# EAGLE board drivercontrols_adafruit_M0 (EAGLE 9.5.1)
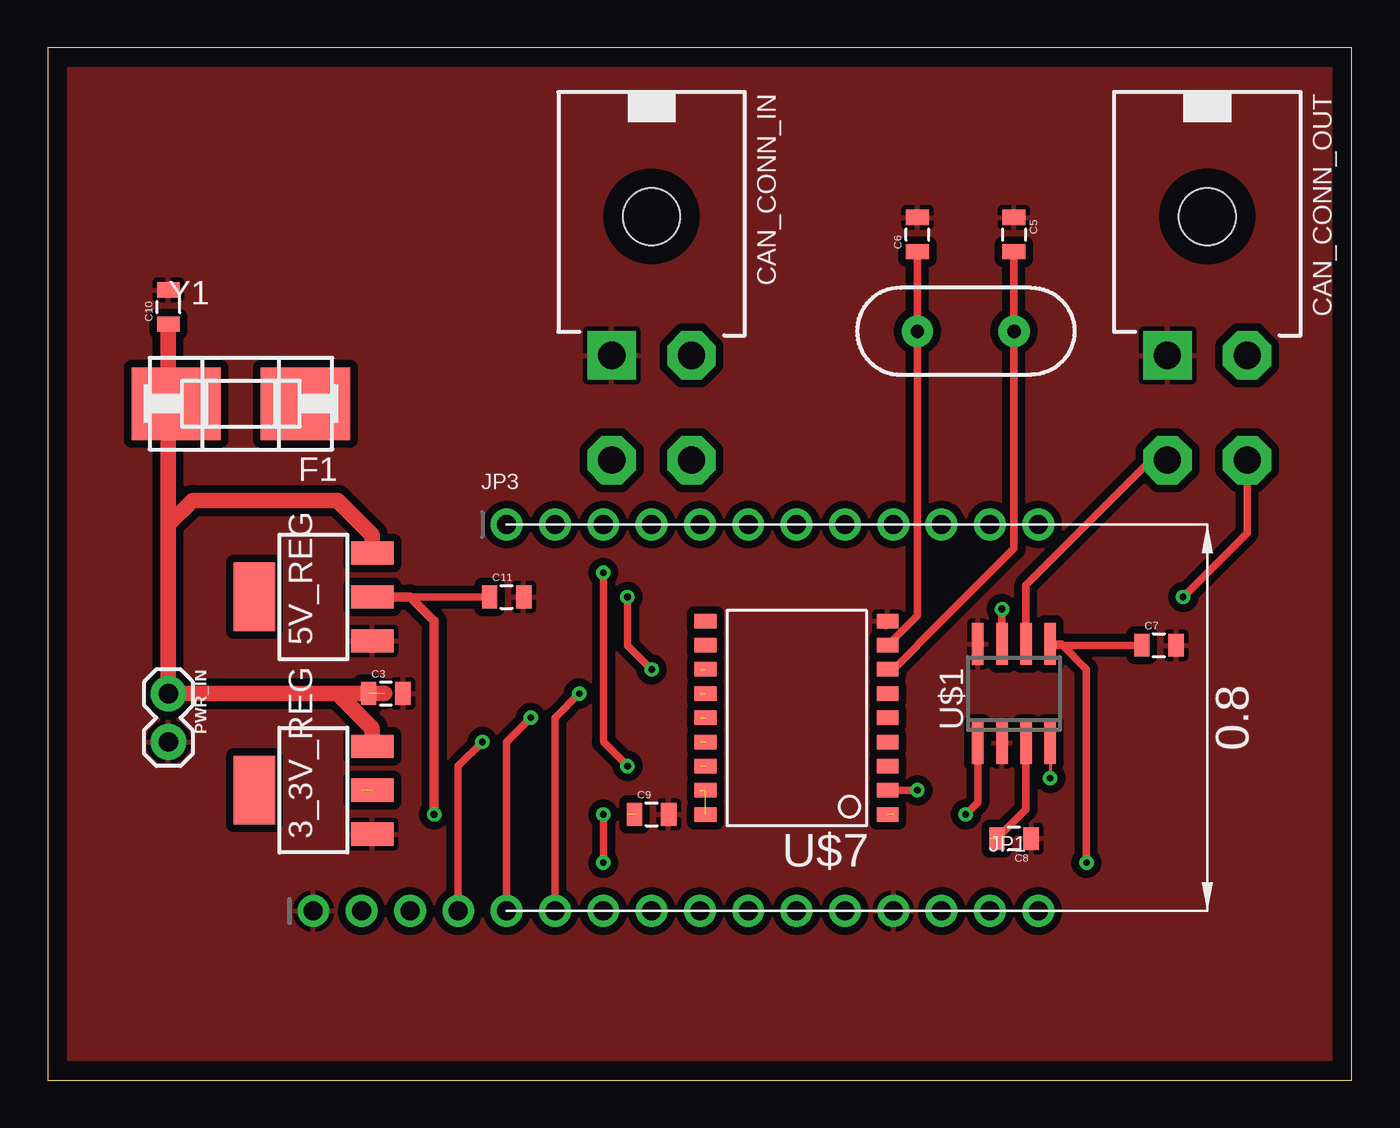
[diagram p0: board, top side]
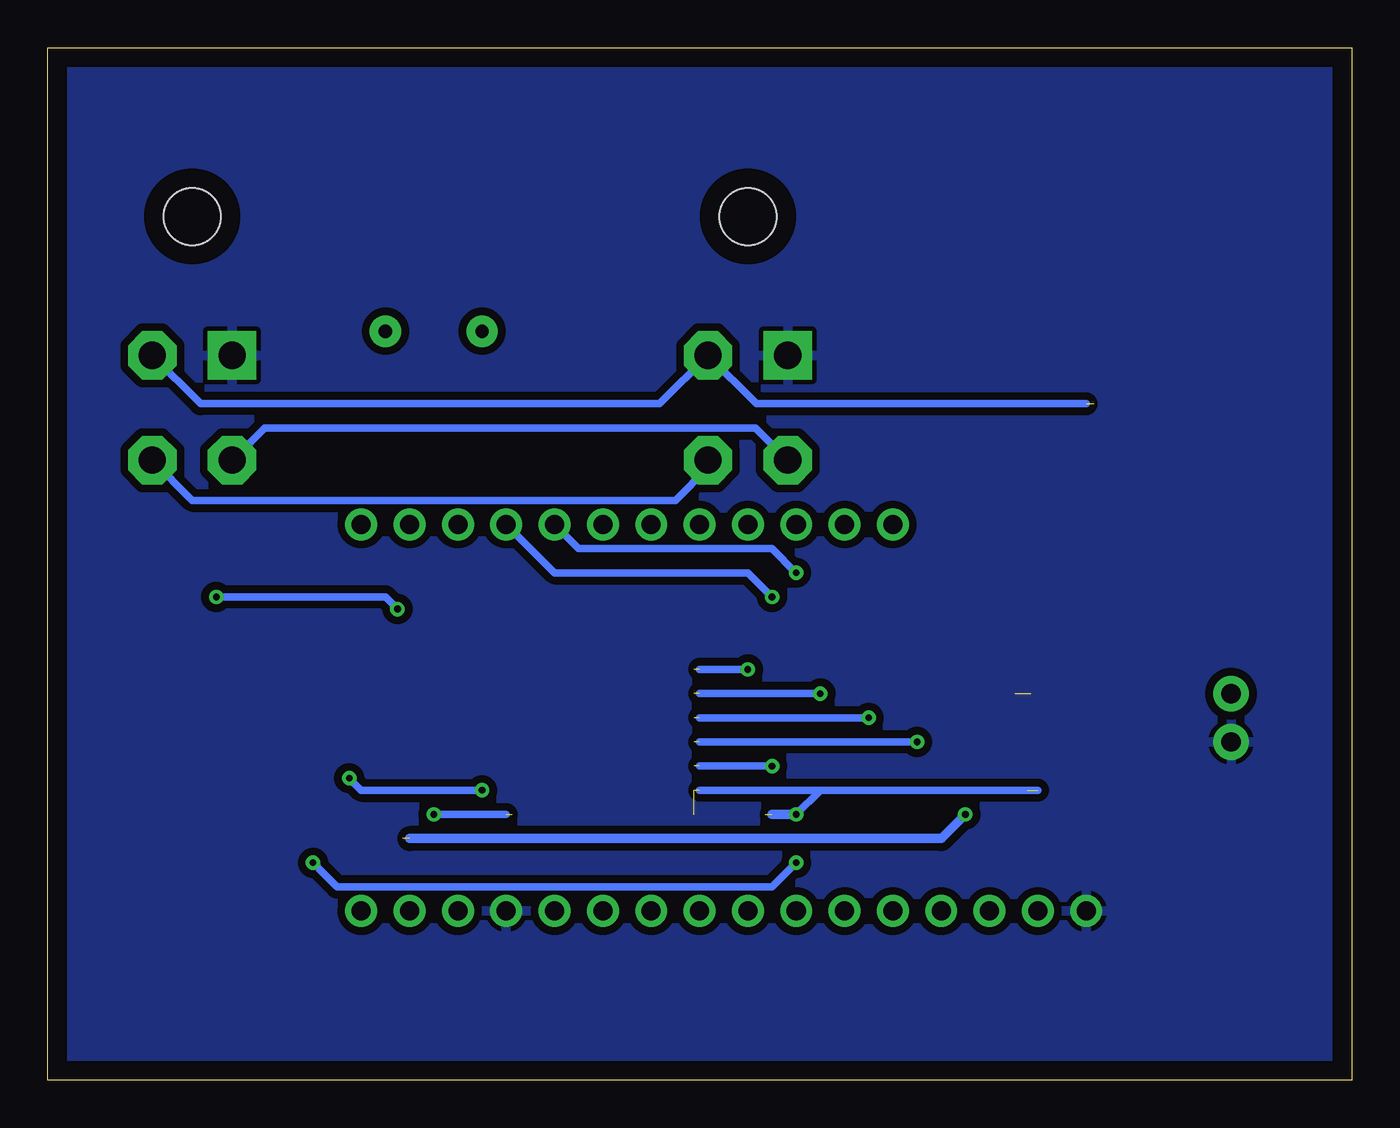
[diagram p1: board, bottom side, seen from below]

Size 68.56 x 54.28 mm. Coordinates in mm from the lower left corner, seen from the top.
Outline: 0,0 68.56,0 68.56,54.28 0,54.28 0,0
Copper layers (1*16): Top 0.035mm / dielectric 1.5mm / Bottom 0.035mm
Design rules "default": minimum track width 6mil, minimum drill 0.35mm, track to track 6mil, track to pad 6mil, pad to pad 6mil, via to via 6mil, smd to smd 6mil, copper to edge 40mil, drill to drill 6mil, minimum pad ring 10mil, minimum via ring 8mil, stop-mask expansion 4mil, vias tented up to drill 0mil, thermal gap 10mil

## Footprints (pad centres in the part's own frame; a part is rotated, then mirrored left to right if it is on the bottom)
SOT223 = smd 1.219 x 2.235: 1 -2.311,-3.099; 2 0,-3.099; 3 2.311,-3.099 | smd 3.6 x 2.2: 4 0,3.099
0805 = smd 0.8 x 1.2: 1 -0.9,0; 2 0.9,0
39-30-?04? = drill 1.422 pad 2.54 square: 1 2.095,0 | drill 1.422 pad 2.54 octagon: 2 -2.095,0; 3 2.095,5.512; 4 -2.095,5.512 | hole 3: 0,-7.3
OMNIBLOK = smd 4.7 x 3.8: P$1 -3.4,0; P$2 3.4,0
1X16_ROUND = drill 1 pad 1.676: 1 -19.05,0; 2 -16.51,0; 3 -13.97,0; 4 -11.43,0; 5 -8.89,0; 6 -6.35,0; 7 -3.81,0; 8 -1.27,0; 9 1.27,0; 10 3.81,0; 11 6.35,0; 12 8.89,0; 13 11.43,0; 14 13.97,0; 15 16.51,0; 16 19.05,0
1X12_ROUND = drill 1 pad 1.676: 1 -13.97,0; 2 -11.43,0; 3 -8.89,0; 4 -6.35,0; 5 -3.81,0; 6 -1.27,0; 7 1.27,0; 8 3.81,0; 9 6.35,0; 10 8.89,0; 11 11.43,0; 12 13.97,0
1X02 = drill 1.016 pad 1.88: 1 0,0; 2 2.54,0
SOIC8 = smd 0.6 x 2.2: 1 -1.905,-2.6; 2 -0.635,-2.6; 3 0.635,-2.6; 4 1.905,-2.6; 5 1.905,2.6; 6 0.635,2.6; 7 -0.635,2.6; 8 -1.905,2.6
SO-18W = smd 0.762 x 1.143: 1 -5.08,-4.788; 2 -3.81,-4.788; 3 -2.54,-4.788; 4 -1.27,-4.788; 5 0,-4.788; 6 1.27,-4.788; 7 2.54,-4.788; 8 3.81,-4.788; 9 5.08,-4.788; 10 5.08,4.788; 11 3.81,4.788; 12 2.54,4.788; 13 1.27,4.788; 14 0,4.788; 15 -1.27,4.788; 16 -2.54,4.788; 17 -3.81,4.788; 18 -5.08,4.788
HC49US = drill 0.7 pad 1.651: 1 -2.54,0; 2 2.54,0

## Placement (x,y rotation side)
3_3V_REG  NCP1117ST33T3G  [SOT223]  13.97,15.24 90 top
5V_REG  NCP1117ST50T3G  [SOT223]  13.97,25.4 90 top
C3  10µF  [0805]  17.78,20.32 0 top
C5  [0805]  50.8,44.45 270 top
C6  [0805]  45.72,44.45 90 top
C7  .1µF  [0805]  58.42,22.86 0 top
C8  .1µF  [0805]  50.8,12.7 180 top
C9  10µF  [0805]  31.75,13.97 0 top
C10  10µF  [0805]  6.35,40.64 90 top
C11  10µF  [0805]  24.13,25.4 0 top
CAN_CONN_IN  39-30-04?  [39-30-?04?]  31.75,38.1 180 top
CAN_CONN_OUT  39-30-04?  [39-30-?04?]  60.96,38.1 180 top
F1  SMD-MICRO-FUSE-BLOCK  [OMNIBLOK]  10.16,35.56 180 top
JP1  [1X16_ROUND]  33.02,8.89 0 top
JP3  [1X12_ROUND]  38.1,29.21 0 top
PWR_IN  [1X02]  6.35,20.32 270 top
U$1  MCP2562  [SOIC8]  50.8,20.32 0 top
U$7  MCP2515  [SO-18W]  39.37,19.05 90 top
Y1  [HC49US]  48.26,39.37 0 top

## Library data of the parts
3_3V_REG 5V_REG U$1 U$7 = NUSOLAR_Custom
C3 C5-C11 = SparkFun-Capacitors
CAN_CONN_IN CAN_CONN_OUT = con-molex-mini-fit
F1 = f-lf-omniblok-s
JP1 JP3 = microbuilder
PWR_IN = SparkFun-Connectors
Y1 = SparkFun-FreqCtrl

## Nets
3.3V: 3_3V_REG.2 C7.1 C9.1 U$1.5 U$7.17 U$7.18
5V: 5V_REG.2 C8.2 C11.1 U$1.3
!RESET: JP1.16
+3V3: JP1.15
A0: JP1.12
A1: JP1.11
A2: JP1.10
A3: JP1.9
A4: JP1.8
A5: JP1.7
AREF: JP1.14
CAN+: CAN_CONN_IN.2 CAN_CONN_OUT.2 F1.P$1
CAN_CS: JP3.8 U$7.16
CAN_H: CAN_CONN_IN.4 CAN_CONN_OUT.4 U$1.7
CAN_INT: JP3.9 U$7.12
CAN_L: CAN_CONN_IN.3 CAN_CONN_OUT.3 U$1.6
CAN_RX: U$1.4 U$7.2
CAN_TX: U$1.1 U$7.1
D0: JP1.2
D1: JP1.3
D10: JP3.7
D11: JP3.6
D12: JP3.5
D13: JP3.4
EN: JP3.2
GND: 3_3V_REG.1 5V_REG.1 C3.2 C5.1 C6.2 C7.2 C8.1 C9.2 C10.2 C11.2 CAN_CONN_IN.1 CAN_CONN_OUT.1 JP1.1 JP1.13 PWR_IN.2 U$1.2 U$1.8 U$7.9
MISO: JP1.4 U$7.15
MOSI: JP1.5 U$7.14
N$1: C5.2 U$7.7 Y1.2
N$2: 3_3V_REG.3 5V_REG.3 C3.1 C10.1 F1.P$2 PWR_IN.1
N$11: C6.1 U$7.8 Y1.1
SCK: JP1.6 U$7.13
SCL: JP3.11
SDA: JP3.12
STROBE: JP3.10
VBAT: JP3.1
VBUS: JP3.3

## Tracks (layer width: path | path; a pad name or v marks a point on that pad's centre or on a via)
3.3V  (via drill 0.35)  (4 unrouted)
  Top 0.152: U$1.5 52.77,22.86
  Top 0.406: C7.1 52.77,22.86 | v29.21,13.97 v29.21,11.43 | U$1.5 53.28,22.92 54.61,21.59 v54.61,11.43
  Bottom 0.406: 16.51,15.24 27.94,15.24 | 27.94,15.24 34.29,15.24 | 27.94,15.24 v29.21,13.97 | v29.21,11.43 30.48,10.16 53.34,10.16 v54.61,11.43
  Bottom 0.508: 30.48,13.97 v29.21,13.97
5V  (via drill 0.35)  (1 unrouted)
  Top 0.406: U$1.3 51.44,14.23 C8.2 | 19.05,25.4 C11.1
  Top 0.508: v20.32,13.97 20.32,24.13 19.05,25.4 5V_REG.2
  Bottom 0.508: v20.32,13.97 21.59,12.7 49.53,12.7
CAN+  (1 unrouted)
  Bottom 0.406: 13.97,35.56 31.31,35.56 CAN_CONN_IN.2 36.39,35.56 60.52,35.56 CAN_CONN_OUT.2
CAN_CS  (via drill 0.35)  (1 unrouted)
  Top 0.406: v29.21,26.67 29.21,17.78 v30.48,16.51
  Bottom 0.406: JP3.8 40.64,27.94 30.48,27.94 v29.21,26.67 | v30.48,16.51 34.29,16.51
CAN_H  (via drill 0.35)
  Top 0.406: U$1.7 v50.17,24.77 | v59.69,25.4 63.06,28.77 CAN_CONN_OUT.4
  Bottom 0.406: CAN_CONN_OUT.4 60.95,30.48 35.56,30.48 33.85,32.19 CAN_CONN_IN.4 | v50.17,24.77 50.8,25.4 v59.69,25.4
CAN_INT  (via drill 0.35)  (1 unrouted)
  Top 0.406: v30.48,25.4 30.48,22.86 v31.75,21.59
  Bottom 0.406: JP3.9 41.91,26.67 31.75,26.67 v30.48,25.4 | v31.75,21.59 34.29,21.59
CAN_L
  Top 0.406: U$1.6 51.44,26.03 57.99,32.59 CAN_CONN_OUT.3
  Bottom 0.406: CAN_CONN_OUT.3 57.15,34.29 31.36,34.29 CAN_CONN_IN.3
CAN_RX  (via drill 0.35)
  Top 0.152: U$1.4 v52.7,15.88
  Top 0.406: U$7.2 v45.72,15.24
  Bottom 0.406: v45.72,15.24 52.07,15.24 v52.7,15.88
CAN_TX  (via drill 0.35)  (1 unrouted)
  Top 0.406: v48.26,13.97 48.89,14.6 U$1.1
  Bottom 0.406: v48.26,13.97 44.45,13.97
GND
  pour Top (isolate 0.406): 0,54.61 0,0 68.58,0 68.58,54.61
  pour Bottom (isolate 0.406): 0,54.61 0,0 68.58,0 68.58,54.61
MISO  (via drill 0.35)  (1 unrouted)
  Top 0.406: JP1.4 21.59,16.51 v22.86,17.78
  Bottom 0.406: v22.86,17.78 34.29,17.78
MOSI  (via drill 0.35)  (1 unrouted)
  Top 0.406: JP1.5 24.13,17.78 v25.4,19.05
  Bottom 0.406: v25.4,19.05 34.29,19.05
N$1
  Top 0.152: 44.45,21.59 U$7.7
  Top 0.406: 44.45,21.59 46.99,24.13 50.8,27.94 Y1.2 C5.2
N$2  (1 unrouted)
  Top 0.406: 6.35,35.15 F1.P$2
  Top 0.813: 15.24,20.32 PWR_IN.1 6.35,29.21 | 3_3V_REG.3 17.07,18.49 15.24,20.32 | 6.35,29.21 7.62,30.48 15.24,30.48 17.07,28.65 5V_REG.3 | 15.24,20.32 17.72,20.32 | 6.35,29.21 C10.1 | 6.35,35.15 6.35,35.56
N$11
  Top 0.152: 44.82,23.52
  Top 0.406: U$7.8 44.82,23.52 | 44.82,23.52 45.72,24.42 Y1.1 C6.1
SCK  (via drill 0.35)  (1 unrouted)
  Top 0.406: v27.94,20.32 26.67,19.05 JP1.6
  Bottom 0.406: v27.94,20.32 34.29,20.32